# EAGLE board Toasty Relay Module v1 (EAGLE 8.4.0)
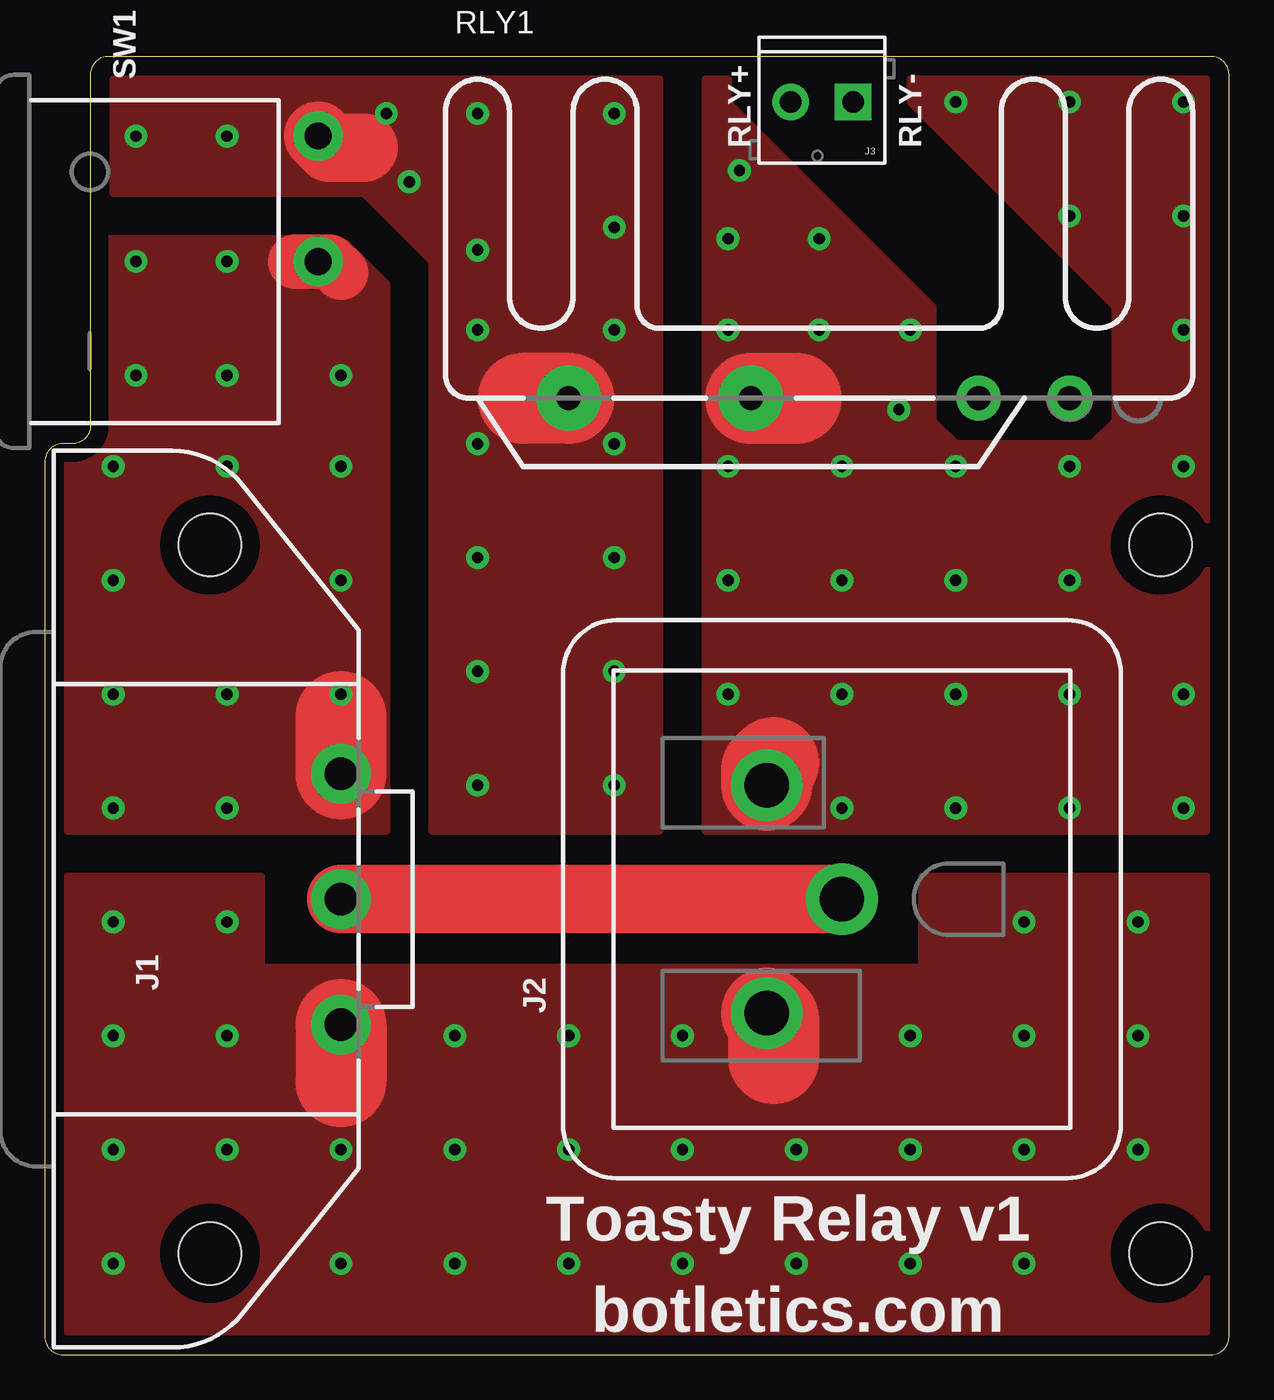
[diagram p0: board, top side]
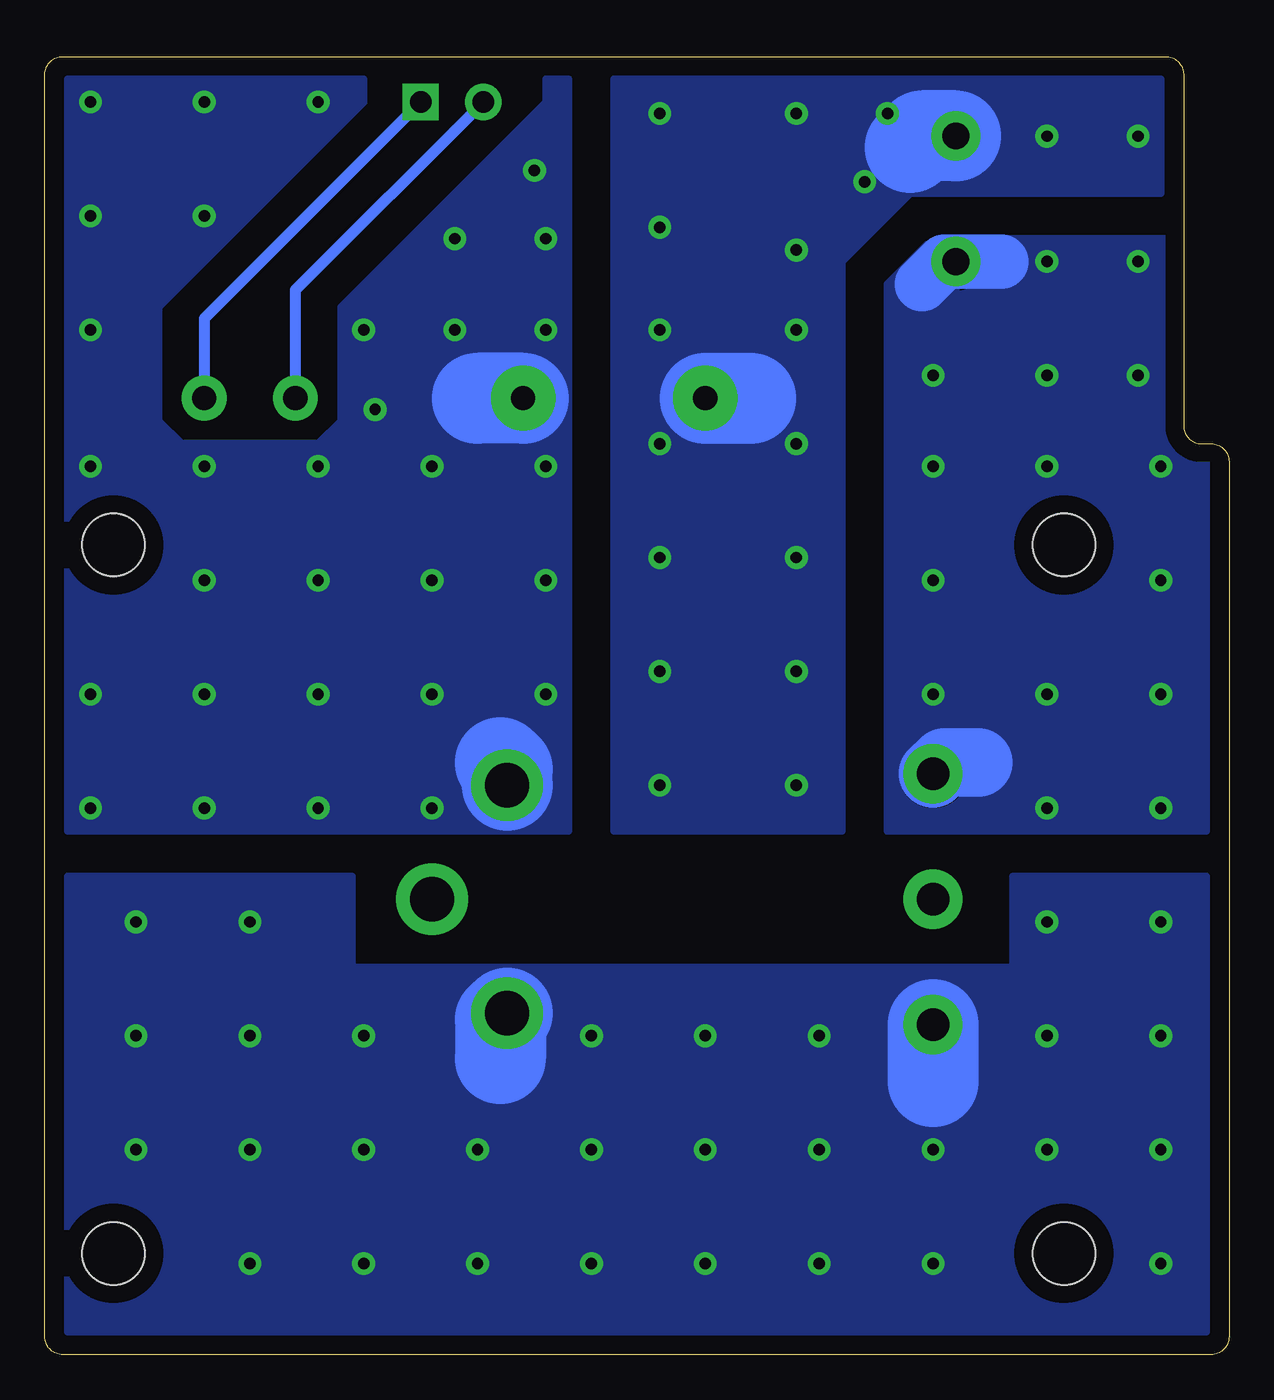
[diagram p1: board, bottom side, seen from below]

Size 66.04 x 72.39 mm. Coordinates in mm from the lower left corner, seen from the top.
Outline: 0,49.8 0,1 arc90 1,0 65.04,0 arc90 66.04,1 66.04,71.39 arc90 65.04,72.39 3.54,72.39 arc90 2.54,71.39 2.54,51.8 arc-90 1.54,50.8 1,50.8 arc90 0,49.8
Copper layers (1*16): Top 0.035mm / dielectric 1.5mm / Bottom 0.035mm
Design rules "default": minimum track width 6mil, minimum drill 0.35mm, track to track 6mil, track to pad 6mil, pad to pad 6mil, via to via 6mil, smd to smd 6mil, copper to edge 40mil, drill to drill 6mil, minimum pad ring 10mil, minimum via ring 8mil, stop-mask expansion 4mil, vias tented up to drill 0mil, thermal gap 10mil
Holes 3.5 mm at 62.21,45.15 62.21,5.65

## Footprints (pad centres in the part's own frame; a part is rotated, then mirrored left to right if it is on the bottom)
703W-00/53 = drill 1.8 pad 3.3: E 0,0; L 7,0; N -7,0 | hole 3.5: 19.75,7.3; -19.75,7.3
3-213598-2 = drill 2.47 pad 4: GND 0,0; L 6.35,4.19; N -6.35,4.19
SCREWTERMINAL-3.5MM-2 = drill 1.2 pad 2.032 square: 1 0,0 | drill 1.2 pad 2.032: 2 3.5,0
RELAY_PF240 = drill 1.35 pad 2.5: 1 13.97,0; 2 8.89,0 | drill 1.35 pad 3.6: 3 -3.81,0; 4 -13.97,0
R1966ABLKBLKFR = drill 1.5 pad 2.75: 1 0,0; 2 7,0

## Placement (x,y rotation side)
J1  C14  [703W-00/53]  16.51,25.4 90 top
J2  NEMA  [3-213598-2]  44.45,25.4 90 top
J3  RLY Control  [SCREWTERMINAL-3.5MM-2]  45.09,69.85 180 top
RLY1  PF240D25R  [RELAY_PF240]  43.18,53.34 0 top
SW1  Rocker  [R1966ABLKBLKFR]  15.24,60.96 90 top

## Library data of the parts
J1 J2 = TimWoo-Connectors
J3 = TimWoo-Connectors; PROD_ID: CONN-08399
RLY1 SW1 = TimWoo-Electromechanical

## Nets
GND: J1.E J2.GND
L: RLY1.4 SW1.2
L_SW: J2.L RLY1.3
L_WALL: J1.L SW1.1
N: J1.N J2.N
RLY+: J3.2 RLY1.2
RLY-: J3.1 RLY1.1

## Tracks (layer width: path | path; a pad name or v marks a point on that pad's centre or on a via)
GND
  Top 3.81: J1.E J2.GND
L  (via drill 0.64 pad 1.27)
  Top 3.81: SW1.2 15.89,67.31 17.78,67.31
  Top 5.08: RLY1.4 26.67,53.34
  Bottom 5.08: SW1.2 17.13,67.96 17.78,67.31 | RLY1.4 26.67,53.34
  other vias: 5.08,67.94 10.16,67.94 24.13,69.22 20.32,65.41 24.13,61.59 24.13,44.45 24.13,38.1 24.13,31.75 31.75,38.1 31.75,31.75 31.75,44.45 19.05,69.22 31.75,69.22 31.75,62.87 31.75,57.15 31.75,50.8 24.13,50.8 24.13,57.15
  pour Top: 21.59,29.21 21.59,60.96 17.78,64.77 3.81,64.77 3.81,71.12 34.29,71.12 34.29,29.21
  pour Bottom: 3.81,71.12 3.81,64.77 17.78,64.77 21.59,60.96 21.59,29.21 34.29,29.21 34.29,71.12
L_SW  (via drill 0.64 pad 1.27)
  Top 5.08: RLY1.3 41.91,53.34 | J2.L 40.26,32.64 40.64,33.02
  Bottom 5.08: RLY1.3 41.91,53.34 | J2.L 40.26,32.64 40.64,33.02
  other vias: 38.73,66.04 43.18,62.23 43.18,57.15 50.8,69.85 57.15,69.85 63.5,69.85 63.5,57.15 57.15,63.5 63.5,63.5 38.1,57.15 38.1,49.53 44.45,49.53 38.1,43.18 44.45,43.18 38.1,36.83 44.45,36.83 50.8,36.83 57.15,36.83 63.5,36.83 63.5,30.48 57.15,30.48 50.8,30.48 50.8,43.18 57.15,43.18 50.8,49.53 44.45,30.48 57.15,49.53 63.5,49.53 48.26,57.15 38.1,62.23 47.62,52.7
  pour Bottom: 36.83,71.12 38.1,71.12 38.1,69.85 49.53,58.42 49.53,52.07 50.8,50.8 58.42,50.8 59.69,52.07 59.69,58.42 48.26,69.85 48.26,71.12 64.77,71.12 64.77,29.21 36.83,29.21
  pour Top: 36.83,71.12 38.1,71.12 38.1,69.85 49.53,58.42 49.53,52.07 50.8,50.8 58.42,50.8 59.69,52.07 59.69,58.42 48.26,69.85 48.26,71.12 64.77,71.12 64.77,29.21 36.83,29.21
L_WALL  (via drill 0.64 pad 1.27)
  Top 3.048: 13.97,60.96 SW1.1 15.88,60.96 16.51,60.33
  Top 5.08: J1.L 16.51,35.56
  Bottom 3.048: 12.7,60.96 SW1.1 15.88,60.96 17.14,59.69
  Bottom 3.81: J1.L 15.89,33.02 13.97,33.02
  other vias: 5.08,60.96 10.16,60.96 10.16,54.61 5.08,54.61 3.81,49.53 3.81,43.18 3.81,36.83 10.16,36.83 3.81,30.48 10.16,30.48 10.16,49.53 16.51,49.53 16.51,43.18 16.51,36.83 16.51,54.61
  pour Top: 19.05,29.21 1.27,29.21 1.27,62.23 16.51,62.23 19.05,59.69
  pour Bottom: 1.27,62.23 16.51,62.23 19.05,59.69 19.05,29.21 1.27,29.21
N  (via drill 0.64 pad 1.27)
  Top 5.08: J1.N 16.51,15.24 | J2.N 40.64,18.67 40.64,16.51
  Bottom 5.08: J1.N 16.51,15.24 | J2.N 40.64,18.67 40.64,16.51
  other vias: 3.81,24.13 10.16,24.13 3.81,17.78 10.16,17.78 3.81,11.43 3.81,5.08 10.16,11.43 16.51,11.43 16.51,5.08 22.86,5.08 22.86,11.43 22.86,17.78 29.21,17.78 29.21,11.43 35.56,11.43 41.91,11.43 41.91,5.08 48.26,5.08 48.26,11.43 48.26,17.78 54.61,17.78 54.61,11.43 54.61,5.08 60.96,11.43 60.96,17.78 29.21,5.08 35.56,5.08 54.61,24.13 60.96,24.13 35.56,17.78
  pour Top: 1.27,26.67 12.06,26.67 12.06,21.59 48.9,21.59 48.9,26.67 64.77,26.67 64.77,1.27 1.27,1.27
  pour Bottom: 1.27,26.67 12.06,26.67 12.06,21.59 48.9,21.59 48.9,26.67 64.77,26.67 64.77,1.27 1.27,1.27
RLY+
  Bottom 0.61: J3.2 52.07,59.37 RLY1.2
RLY-
  Bottom 0.61: J3.1 57.15,57.78 RLY1.1

## Text on the board
tPlace: RLY+ | RLY- | Toasty Relay v1 | botletics.com
tDocu: Designed by Timothy Woo / Released under CC-BY-SA-4.0 license